# Altium PCB Therms.PcbDoc
Units mm, origin at the board's own origin, x right, y up, seen from the top; angles counter-clockwise.
Board outline 79.5 x 62.99 mm, 2 copper layers (Top Layer, Bottom Layer), stack 1.57 mm thick; 35 components, 56 nets, 117 pads, 0 vias.
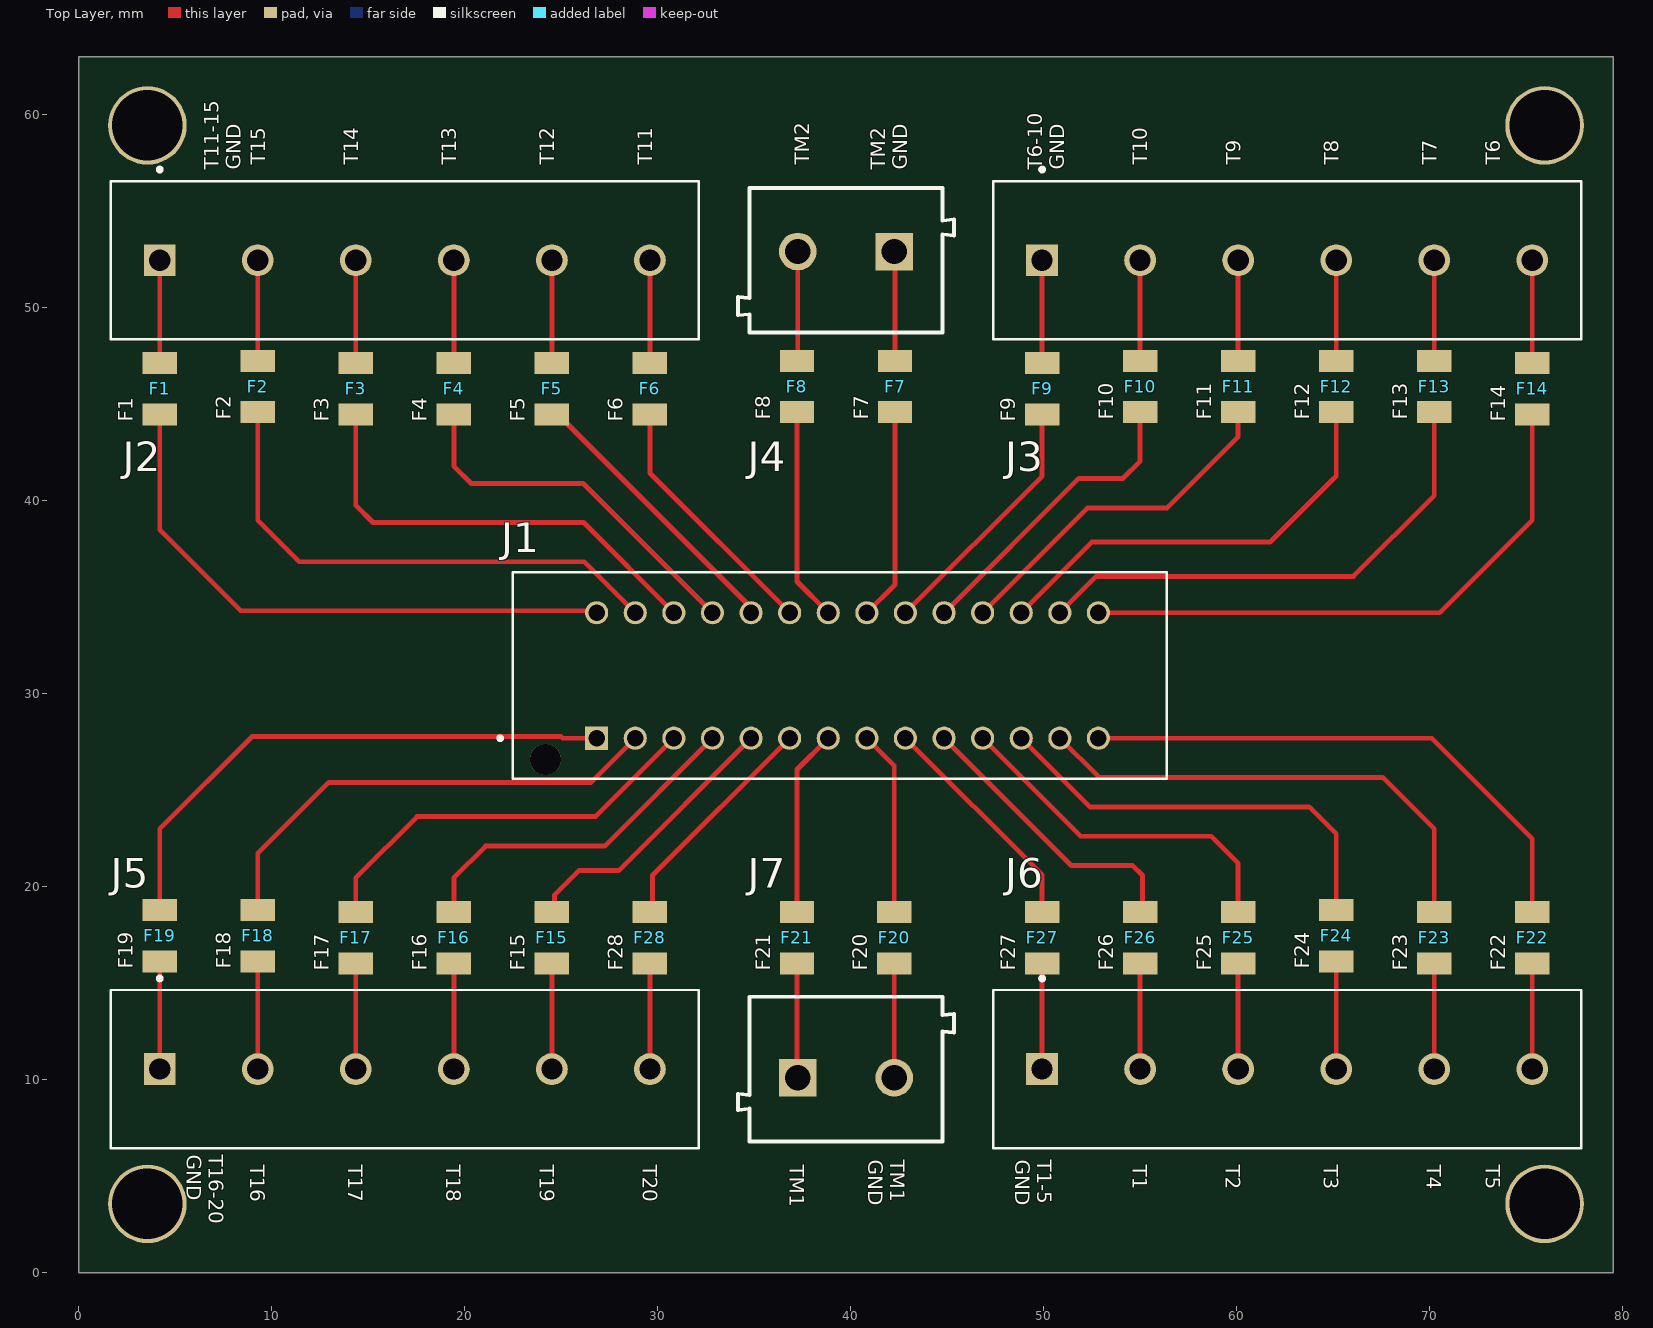
[diagram p0: Top Layer view]
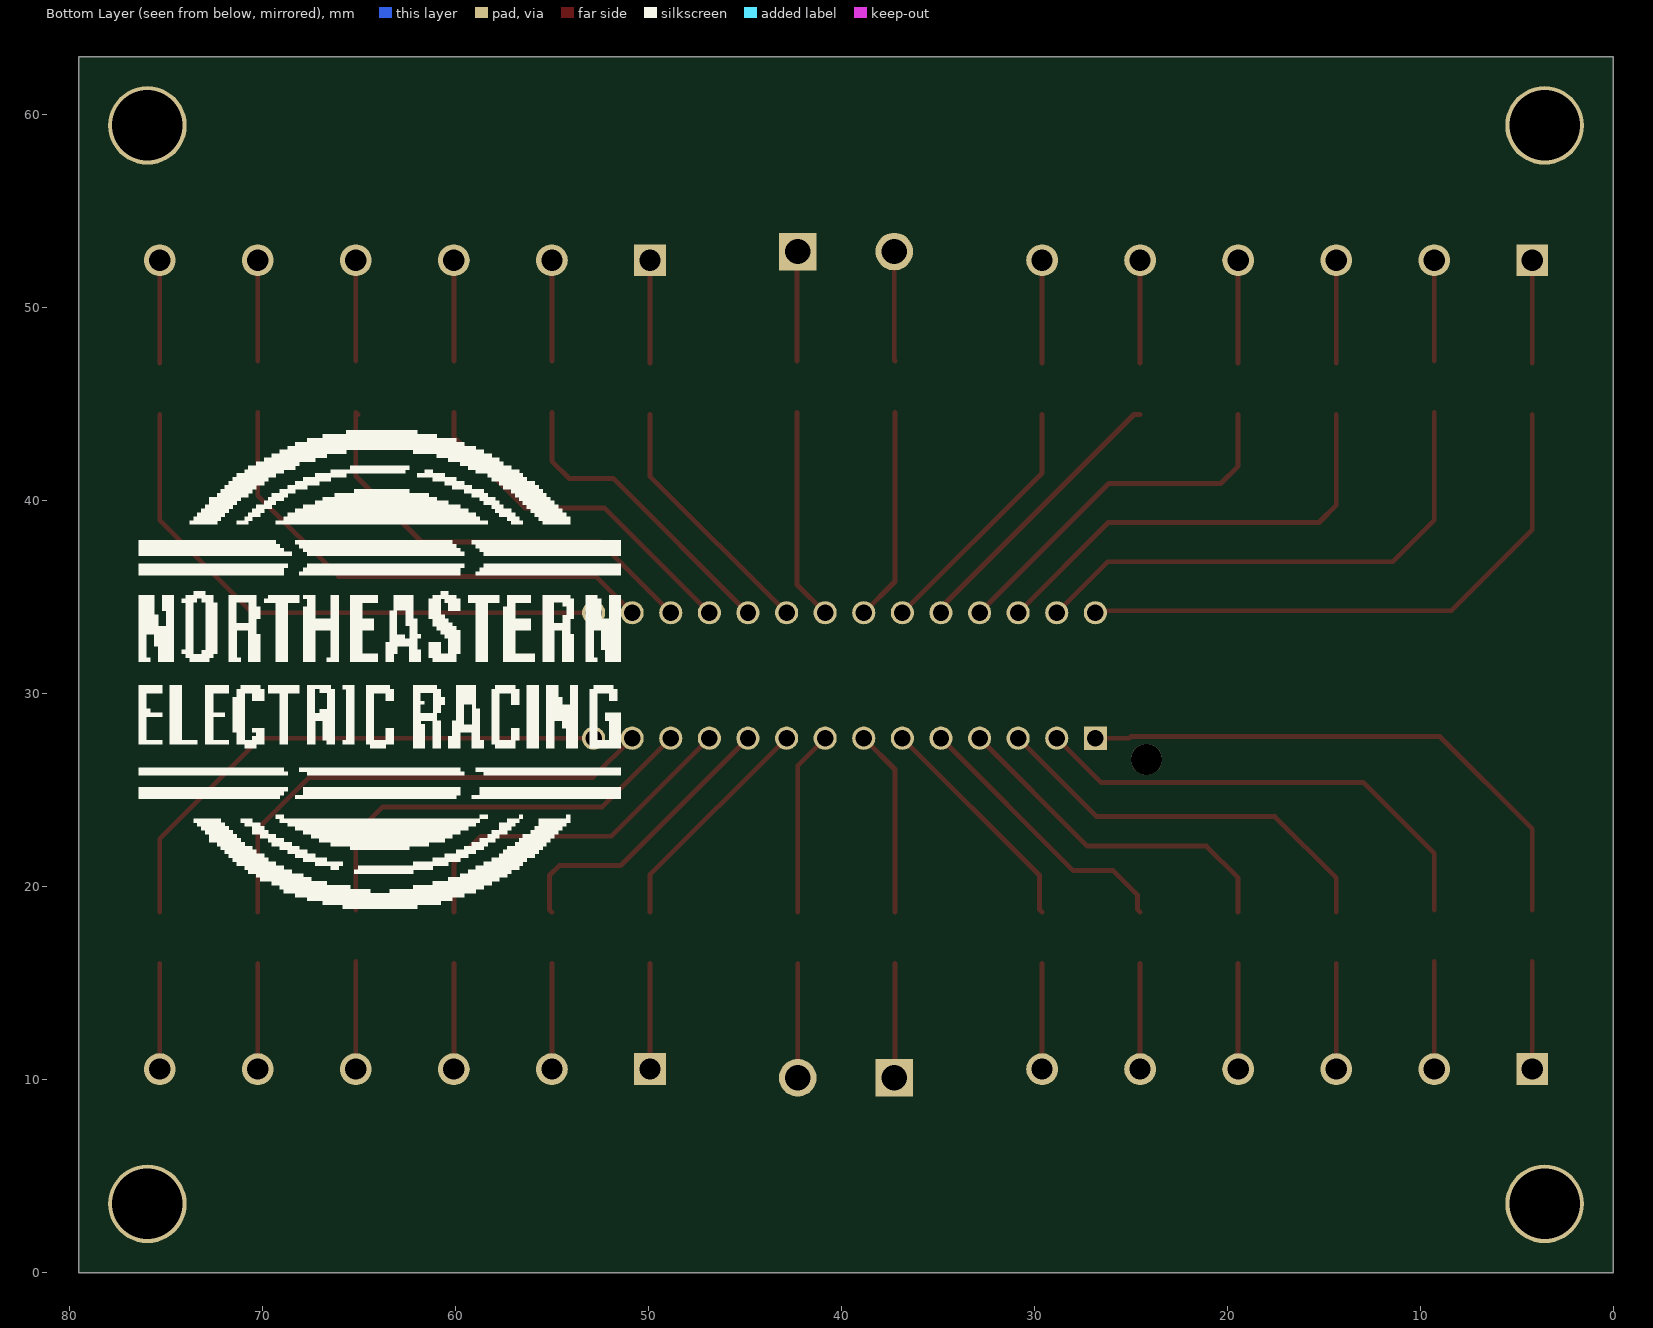
[diagram p1: Bottom Layer view, seen from below]
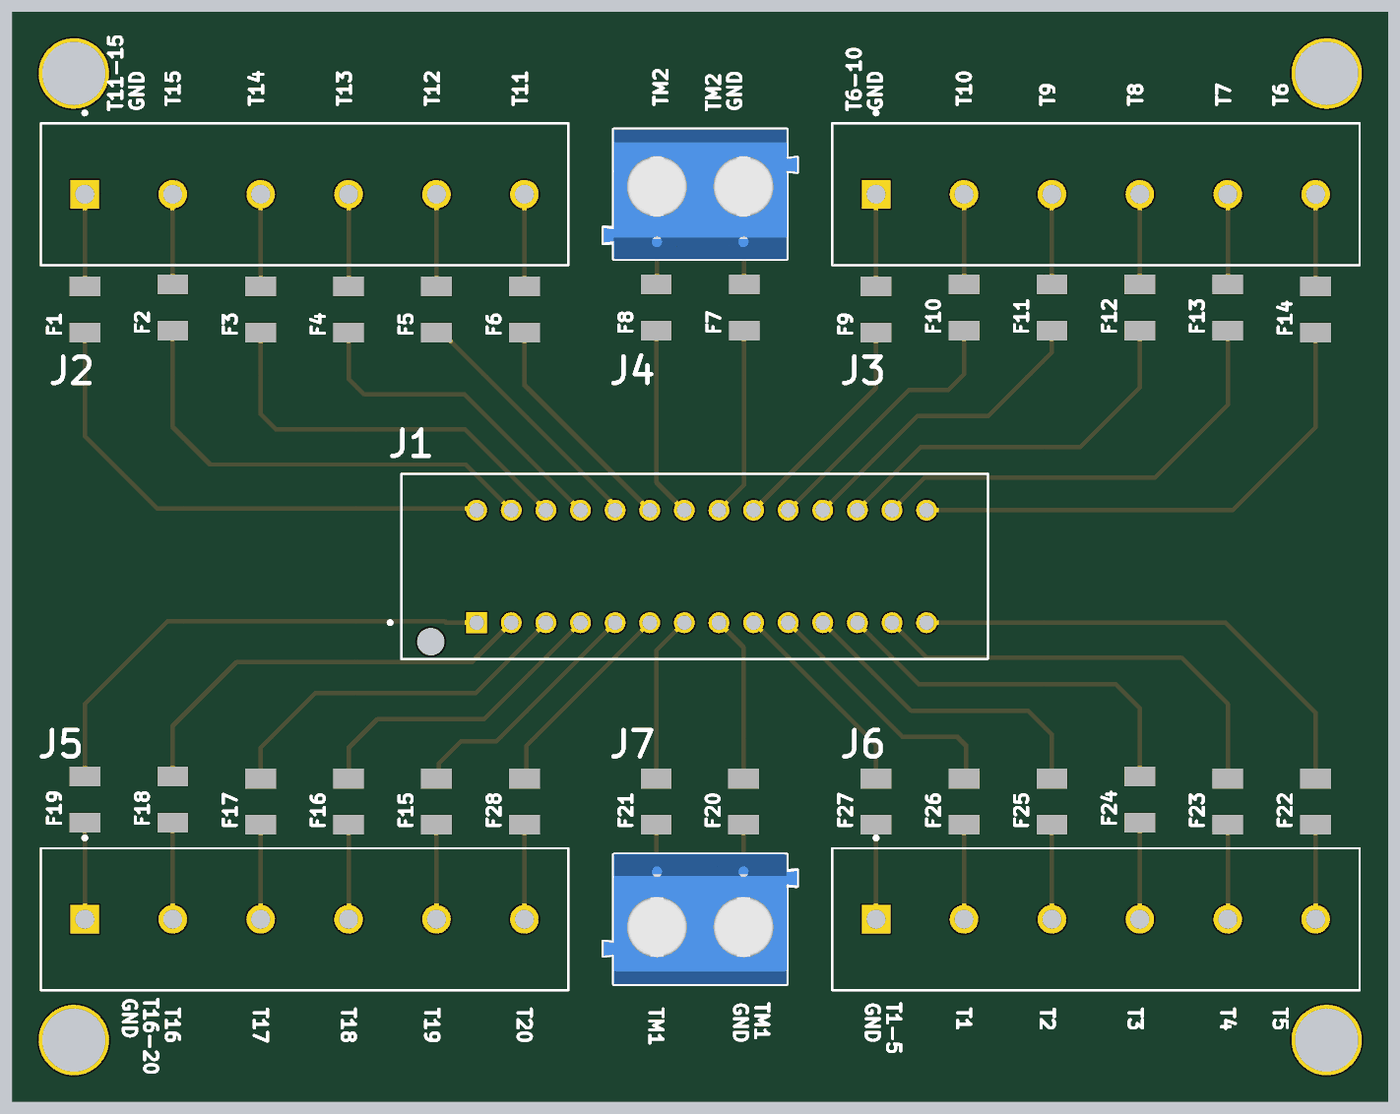
[diagram p2: 3D render of the assembled board from above, using the file's embedded part models]

## Layer stack, top to bottom
Top Solder: solder mask 0.0102, Solder Resist, Dk 3.5
Top Layer: signal copper 0.0356
Dielectric 1: core 1.4986, Core-043, Dk 4.3
Bottom Layer: signal copper 0.0356
Bottom Solder: solder mask 0.0102, Solder Resist, Dk 3.5

## Board outline
0,0 79.502,0 79.502,62.992 0,62.992

## Design rules (kind name [scope] priority, off if disabled: settings)
Clearance [All] p1: gap=0.254 ignorepadtopadclearanceinfootprint=FALSE except(0: Arc-Hole Track-Hole SMDPad-Hole THPad-Hole Via-Hole Fill-Hole Poly-Hole Region-Hole Text-Hole)
PolygonConnect [All] p1: connectstyle=Relief reliefconductorwidth=0.254 reliefentries=4 polygonreliefangle="90 Angle" airgapwidth=0.254
RoomDefinition Therms [InComponentClass('Therms')] p1: confinementstyle=ConfineIn formatcopy=TRUE lockcomponents=FALSE outline 154.559,2.667 226.822,2.667 226.822,40.513 154.559,40.513
RoutingVias [All] p1: holewidth=0.711 width=1.27 viastyle="Through Hole" minholewidth=0.711 minwidth=1.27 maxholewidth=0.711 maxwidth=1.27
SolderMaskExpansion [All] p1: expansion=0.102 istentingtop=FALSE
Width [All] p1: maxlimit=0.254 minlimit=0.254 preferedwidth=0.254
30 further rules are at their usual default settings.

## Components (designator, comment, footprint, x,y, rotation, side; value= is the part's Value field where it differs from the comment)
F1 "C1T5" C1T5 4.191,44.457 r90 top
F2 "C1T5" C1T5 9.271,44.577 r90 top
F3 "C1T5" C1T5 14.351,44.457 r90 top
F4 "C1T5" C1T5 19.431,44.457 r90 top
F5 "C1T5" C1T5 24.511,44.457 r90 top
F6 "C1T5" C1T5 29.591,44.457 r90 top
F7 "C1T5" C1T5 42.291,44.577 r90 top
F8 "C1T5" C1T5 37.211,44.577 r90 top
F9 "C1T5" C1T5 49.911,44.457 r90 top
F10 "C1T5" C1T5 54.991,44.577 r90 top
F11 "C1T5" C1T5 60.071,44.577 r90 top
F12 "C1T5" C1T5 65.151,44.577 r90 top
F13 "C1T5" C1T5 70.231,44.577 r90 top
F14 "C1T5" C1T5 75.311,44.457 r90 top
F15 "C1T5" C1T5 24.511,16.009 r90 top
F16 "C1T5" C1T5 19.431,16.009 r90 top
F17 "C1T5" C1T5 14.351,16.009 r90 top
F18 "C1T5" C1T5 9.271,16.129 r90 top
F19 "C1T5" C1T5 4.191,16.129 r90 top
F20 "C1T5" C1T5 42.251,16.009 r90 top
F21 "C1T5" C1T5 37.211,16.009 r90 top
F22 "C1T5" C1T5 75.311,16.009 r90 top
F23 "C1T5" C1T5 70.231,16.009 r90 top
F24 "C1T5" C1T5 65.151,16.129 r90 top
F25 "C1T5" C1T5 60.071,16.009 r90 top
F26 "C1T5" C1T5 54.991,16.009 r90 top
F27 "C1T5" C1T5 49.911,16.009 r90 top
F28 "C1T5" C1T5 29.591,16.009 r90 top
J1 "2-292141-8" TE_2-292141-8 26.831,27.686 r0 top
J2 "282837-6" TE_282837-6 16.891,52.451 r0 top
J3 "282837-6" TE_282837-6 62.611,52.451 r0 top
J4 "691102710002" 691102710002 39.751,52.451 r180 top
J5 "282837-6" TE_282837-6 16.891,10.541 r0 top
J6 "282837-6" TE_282837-6 62.611,10.541 r0 top
J7 "691102710002" 691102710002 39.751,10.541 r0 top

## Footprints (in the part's own frame and the unit in brackets; to place one, negate y for a bottom-side part, rotate by r counter-clockwise, add the part's x,y. Pads: shape width x height; smd on the part's side, far side on the other; paste and mask are expansions set on the pad)
691102710002 [mm] "5,00mm - modular - blue - Horizontal entry with pressure clamp - 9,9 mm height - 02p"
  rect 1.95x1.95 hole 1.3: 1(-2.5,-0.45)
  round 1.95 hole 1.3: 2(2.5,-0.45)
  silkscreen extent -5.6,-3.75 5.6,3.75, body extent -5.6,-3.75 5.6,3.75, height 9.96
C1T5 [mm]
  rect 1.14x1.78 smd mask+0.025: 1(0,0) 2(2.66,0)
  body extent -0.3,-0.79 2.9,0.79, height 0.61
TE_2-292141-8 [mm]
  rect 1.2x1.2 hole 0.85: 1(0,0)
  round 1.2 hole 0.85: 2(2,0) 3(4,0) 4(6,0) 5(8,0) 6(10,0) 7(12,0) 8(14,0) 9(16,0) 10(18,0) 11(20,0) 12(22,0) 13(24,0) 14(26,0) 15(0,6.5) 16(2,6.5) 17(4,6.5) 18(6,6.5) 19(8,6.5) 20(10,6.5) 21(12,6.5) 22(14,6.5) 23(16,6.5) 24(18,6.5) 25(20,6.5) 26(22,6.5) 27(24,6.5) 28(26,6.5)
  round 1.6 hole 1.6 unplated: ""(-2.65,-1.1)
  silkscreen extent -5.1,-2.1 29.55,8.6
TE_282837-6 [mm]
  rect 1.65x1.65 hole 1.1: 1(-12.7,0)
  round 1.65 hole 1.1: 2(-7.62,0) 3(-2.54,0) 4(2.54,0) 5(7.62,0) 6(12.7,0)
  silkscreen extent -15.24,-4.1 15.24,4.8

## Part data
J1: Package=None, Availability=Unavailable, MF="{'manufacturer': 'TE Connectivity'}", MP=2-292141-8, Price=None
J2 J3 J5 J6: "Conn Terminal Block F 6 POS 5.08mm Solder ST Thru-Hole 13.5A/Contact", Package=None, Availability=Unavailable, EU_RoHS_Compliance="Compliant with Exemptions", MF="TE Connectivity", MP=282837-6, Price=None, SnapEDA_Link=https://www.snapeda.com/parts/282837-6/TE%20Connectivity%20AMP%20Connectors/view-part/520355/?ref=snap, TE_purchase_URL=https://www.te.com/usa-en/product-282837-6.html?te_bu=Cor&te_type=disp&te_campaign=seda_glo_cor-seda-global-disp-prtnr-fy19-seda-model-bom-cta_sma-317_1&elqCampaignId=32493
J4 J7: library part CMP-1502-03258-1, "Series 102 - 5.00 mm Horizontal Entry Modular with Pressure Clamp WR-TBL, 2 pin", Manufacturer="Wurth Elektronik", Operating Temperature=-40to105degC, Datasheet URL=http://katalog.we-online.de/em/datasheet/6911027100xx.pdf, Manufacturer URL=http://www.we-online.de, Mounting Technology=THT, Package Reference=691102710002, Packaging=Box, Part Number=691102710002, Pin Number=2, Pitch=5.00mm, Publisher=WurthElektronik
F1 F2 F3 F4 F5 F6 F7 F8 F9 F10 F11 F12 F13 F14 F15 F16 F17 F18 F19 F20 F21 F22 F23 F24 F25 F26 F27 F28: ComponentLink1Description="New link", ComponentLink1URL=https://www.mouser.com/ProductDetail/Bel-Fuse/C1T5?qs=GtFly9OVs8%2FF1GxRAaUoTA%3D%3D#.Xzf8gWXWqWc.link

## Free pads (board coordinates)
  round 4.064 hole 3.658: 8(3.556,3.556) 9(75.946,3.556) 10(75.946,59.436) 11(3.556,59.436)

## Nets (pads, with @x,y where several pads share a name; then routed paths per layer and width w, separated by ;. In a path a pad name is that pad's centre, name@x,y a point inside that pad or via, vN(x,y) a via of type N, cw(c..) or ccw(c..) an arc to the next point about the centre after c; other vN are vias at no path point)
NetF1_1: F1.1 J1.15 | length 30.4
  Top Layer w0.254: F1.1 4.191,38.481 8.382,34.29 26.727,34.29 J1.15
NetF1_2: F1.2 J2.1 | length 5.3
  Top Layer w0.254: F1.2 J2.1
NetF2_1: F2.1 J1.16 | length 27.1
  Top Layer w0.254: F2.1 9.271,38.989 11.43,36.83 26.187,36.83 J1.16
NetF2_2: F2.2 J2.2 | length 5.2
  Top Layer w0.254: F2.2 J2.2
NetF3_1: F3.1 J1.17 | length 23.5
  Top Layer w0.254: F3.1 14.351,39.751 15.24,38.862 26.155,38.862 J1.17
NetF3_2: F3.2 J2.3 | length 5.3
  Top Layer w0.254: F3.2 J2.3
NetF4_1: F4.1 J1.18 | length 19.2
  Top Layer w0.254: F4.1 19.431,41.783 20.32,40.894 26.123,40.894 J1.18
NetF4_2: F4.2 J2.4 | length 5.3
  Top Layer w0.254: F4.2 J2.4
NetF5_1: F5.1 J1.19 | length 14.7
  Top Layer w0.254: F5.1 24.831,44.457 34.65,34.638 34.65,34.367 J1.19
NetF5_2: F5.2 J2.5 | length 5.3
  Top Layer w0.254: F5.2 J2.5
NetF6_1: F6.1 J1.20 | length 13.3
  Top Layer w0.254: F6.1 29.591,41.426 J1.20
NetF6_2: F6.2 J2.6 | length 5.3
  Top Layer w0.254: F6.2 J2.6
NetF7_1: F7.1 J1.22 | length 11
  Top Layer w0.254: J1.22 42.291,35.646 F7.1
NetF7_2: F7.2 J4.1 | length 5.7
  Top Layer w0.254: J4.1 42.291,52.861 F7.2
NetF8_1: F8.1 J1.21 | length 11.1
  Top Layer w0.254: F8.1 37.211,35.806 J1.21
NetF8_2: F8.2 J4.2 | length 5.7
  Top Layer w0.254: F8.2 37.251,47.277 J4.2
NetF9_1: F9.1 J1.23 | length 13.2
  Top Layer w0.254: J1.23 49.911,41.266 F9.1
NetF9_2: F9.2 J3.1 | length 5.3
  Top Layer w0.254: F9.2 J3.1
NetF10_1: F10.1 J1.24 | length 16
  Top Layer w0.254: J1.24 44.854,34.186 51.816,41.148 54.102,41.148 54.991,42.037 F10.1
NetF10_2: F10.2 J3.2 | length 5.2
  Top Layer w0.254: F10.2 J3.2
NetF11_1: F11.1 J1.25 | length 18.3
  Top Layer w0.254: J1.25 52.269,39.624 56.388,39.624 60.071,43.307 F11.1
NetF11_2: F11.2 J3.3 | length 5.2
  Top Layer w0.254: F11.2 J3.3
NetF12_1: F12.1 J1.26 | length 22.7
  Top Layer w0.254: J1.26 52.491,37.846 61.722,37.846 65.151,41.275 F12.1 F12.1@65.024,44.45
NetF12_2: F12.2 J3.4 | length 5.2
  Top Layer w0.254: F12.2 J3.4
NetF13_1: F13.1 J1.27 | length 26.2
  Top Layer w0.254: J1.27 52.713,36.068 66.04,36.068 70.231,40.259 F13.1
NetF13_2: F13.2 J3.5 | length 5.2
  Top Layer w0.254: F13.2 J3.5
NetF14_1: F14.1 J1.28 | length 29.9
  Top Layer w0.254: J1.28 70.508,34.186 75.311,38.989 F14.1
NetF14_2: F14.2 J3.6 | length 5.3
  Top Layer w0.254: F14.2 J3.6
NetF15_1: F15.1 J5.5 | length 5.5
  Top Layer w0.254: J5.5 F15.1
NetF15_2: F15.2 J1.5 | length 14.5
  Top Layer w0.254: F15.2 24.638,18.796 24.638,19.558 25.908,20.828 27.973,20.828 J1.5
NetF16_1: F16.1 J5.4 | length 5.5
  Top Layer w0.254: J5.4 F16.1
NetF16_2: F16.2 J1.4 | length 18.2
  Top Layer w0.254: F16.2 19.431,20.447 21.082,22.098 27.243,22.098 J1.4
NetF17_1: F17.1 J5.3 | length 5.5
  Top Layer w0.254: J5.3 F17.1
NetF17_2: F17.2 J1.3 | length 21.3
  Top Layer w0.254: F17.2 14.351,20.447 17.526,23.622 26.767,23.622 J1.3
NetF18_1: F18.1 J5.2 | length 5.6
  Top Layer w0.254: J5.2 F18.1
NetF18_2: F18.2 J1.2 | length 25
  Top Layer w0.254: F18.2 9.271,21.717 12.954,25.4 26.545,25.4 J1.2
NetF19_1: F19.1 J5.1 | length 5.6
  Top Layer w0.254: J5.1 F19.1
NetF19_2: F19.2 J1.1 | length 28.9
  Top Layer w0.254: F19.2 4.191,22.987 8.971,27.767 24.984,27.767 25.065,27.686 J1.1
NetF20_1: F20.1 J7.2 | length 5.9
  Top Layer w0.254: J7.2 F20.1
NetF20_2: F20.2 J1.8 | length 9.6
  Top Layer w0.254: J1.8 42.251,26.266 F20.2
NetF21_1: F21.1 J7.1 | length 5.9
  Top Layer w0.254: F21.1 37.211,10.131 J7.1
NetF21_2: F21.2 J1.7 | length 9.7
  Top Layer w0.254: F21.2 37.211,26.066 J1.7
NetF22_1: F22.1 J6.6 | length 5.5
  Top Layer w0.254: J6.6 F22.1
NetF22_2: F22.2 J1.14 | length 28.4
  Top Layer w0.254: J1.14 70.104,27.686 75.311,22.479 F22.2
NetF23_1: F23.1 J6.5 | length 5.5
  Top Layer w0.254: J6.5 F23.1
NetF23_2: F23.2 J1.13 | length 25.7
  Top Layer w0.254: J1.13 52.863,25.654 67.564,25.654 70.231,22.987 F23.2
NetF24_1: F24.1 J6.4 | length 5.6
  Top Layer w0.254: J6.4 F24.1
NetF24_2: F24.2 J1.12 | length 22.3
  Top Layer w0.254: J1.12 52.387,24.13 63.754,24.13 65.151,22.733 F24.2
NetF25_1: F25.1 J6.3 | length 5.5
  Top Layer w0.254: J6.3 F25.1
NetF25_2: F25.2 J1.11 | length 18.5
  Top Layer w0.254: J1.11 51.911,22.606 58.674,22.606 60.071,21.209 F25.2
NetF26_1: F26.1 J6.2 | length 5.5
  Top Layer w0.254: J6.2 F26.1
NetF26_2: F26.2 J1.10 | length 15.2
  Top Layer w0.254: J1.10 51.435,21.082 54.61,21.082 55.118,20.574 55.118,18.796 F26.2
NetF27_1: F27.1 J6.1 | length 5.5
  Top Layer w0.254: J6.1 F27.1
NetF27_2: F27.2 J1.9 | length 11.9
  Top Layer w0.254: J1.9 49.911,20.606 F27.2
NetF28_1: F28.1 J5.6 | length 5.5
  Top Layer w0.254: J5.6 F28.1
NetF28_2: F28.2 J1.6 | length 12
  Top Layer w0.254: F28.2 29.718,18.796 29.718,20.574 J1.6
pads on no net: J1.

## Silkscreen, mask and mechanical layers (free items; w line width, h text height)
Top Overlay:
  text "T15" at 9.652,57.404 h0.76 r90
  text "T14" at 14.478,57.404 h0.76 r90
  text "T13" at 19.558,57.404 h0.76 r90
  text "T12" at 24.638,57.404 h0.76 r90
  text "T11" at 29.718,57.404 h0.76 r90
  text "TM2" at 37.846,57.404 h0.76 r90
  text "T10" at 55.372,57.404 h0.76 r90
  text "T9" at 60.198,57.404 h0.76 r90
  text "T8" at 65.278,57.404 h0.76 r90
  text "T7" at 70.358,57.404 h0.76 r90
  text "T6" at 73.66,57.404 h0.76 r90
  text "T11-15 / GND" at 8.382,57.15 h0.76 r90
  text "TM2 / GND" at 42.926,57.15 h0.76 r90
  text "T6-10 / GND" at 51.054,57.15 h0.76 r90
  text "T16-20 / GND" at 5.588,6.096 h0.76 r270
  text "TM1 / GND" at 40.894,5.842 h0.76 r270
  text "T1-5 / GND" at 48.514,5.842 h0.76 r270
  text "T16" at 8.89,5.588 h0.76 r270
  text "T17" at 13.97,5.588 h0.76 r270
  text "T18" at 19.05,5.588 h0.76 r270
  text "T19" at 23.876,5.588 h0.76 r270
  text "T20" at 29.21,5.588 h0.76 r270
  text "TM1" at 36.83,5.588 h0.76 r270
  text "T1" at 54.61,5.588 h0.76 r270
  text "T2" at 59.436,5.588 h0.76 r270
  text "T3" at 64.516,5.588 h0.76 r270
  text "T4" at 69.85,5.588 h0.76 r270
  text "T5" at 72.898,5.588 h0.76 r270
Bottom Overlay:
  drawing of 46 lines, arcs and shapes, not listed
Board Outline:
  the board outline again, w0.254